# Altium PCB MiniSys.PcbDoc
Units mil, origin at the board's own origin, x right, y up, seen from the top; angles counter-clockwise.
Board outline 2000 x 2000 mil, 2 copper layers (Top Layer, Bottom Layer); 39 components, 56 nets, 168 pads, 40 vias.
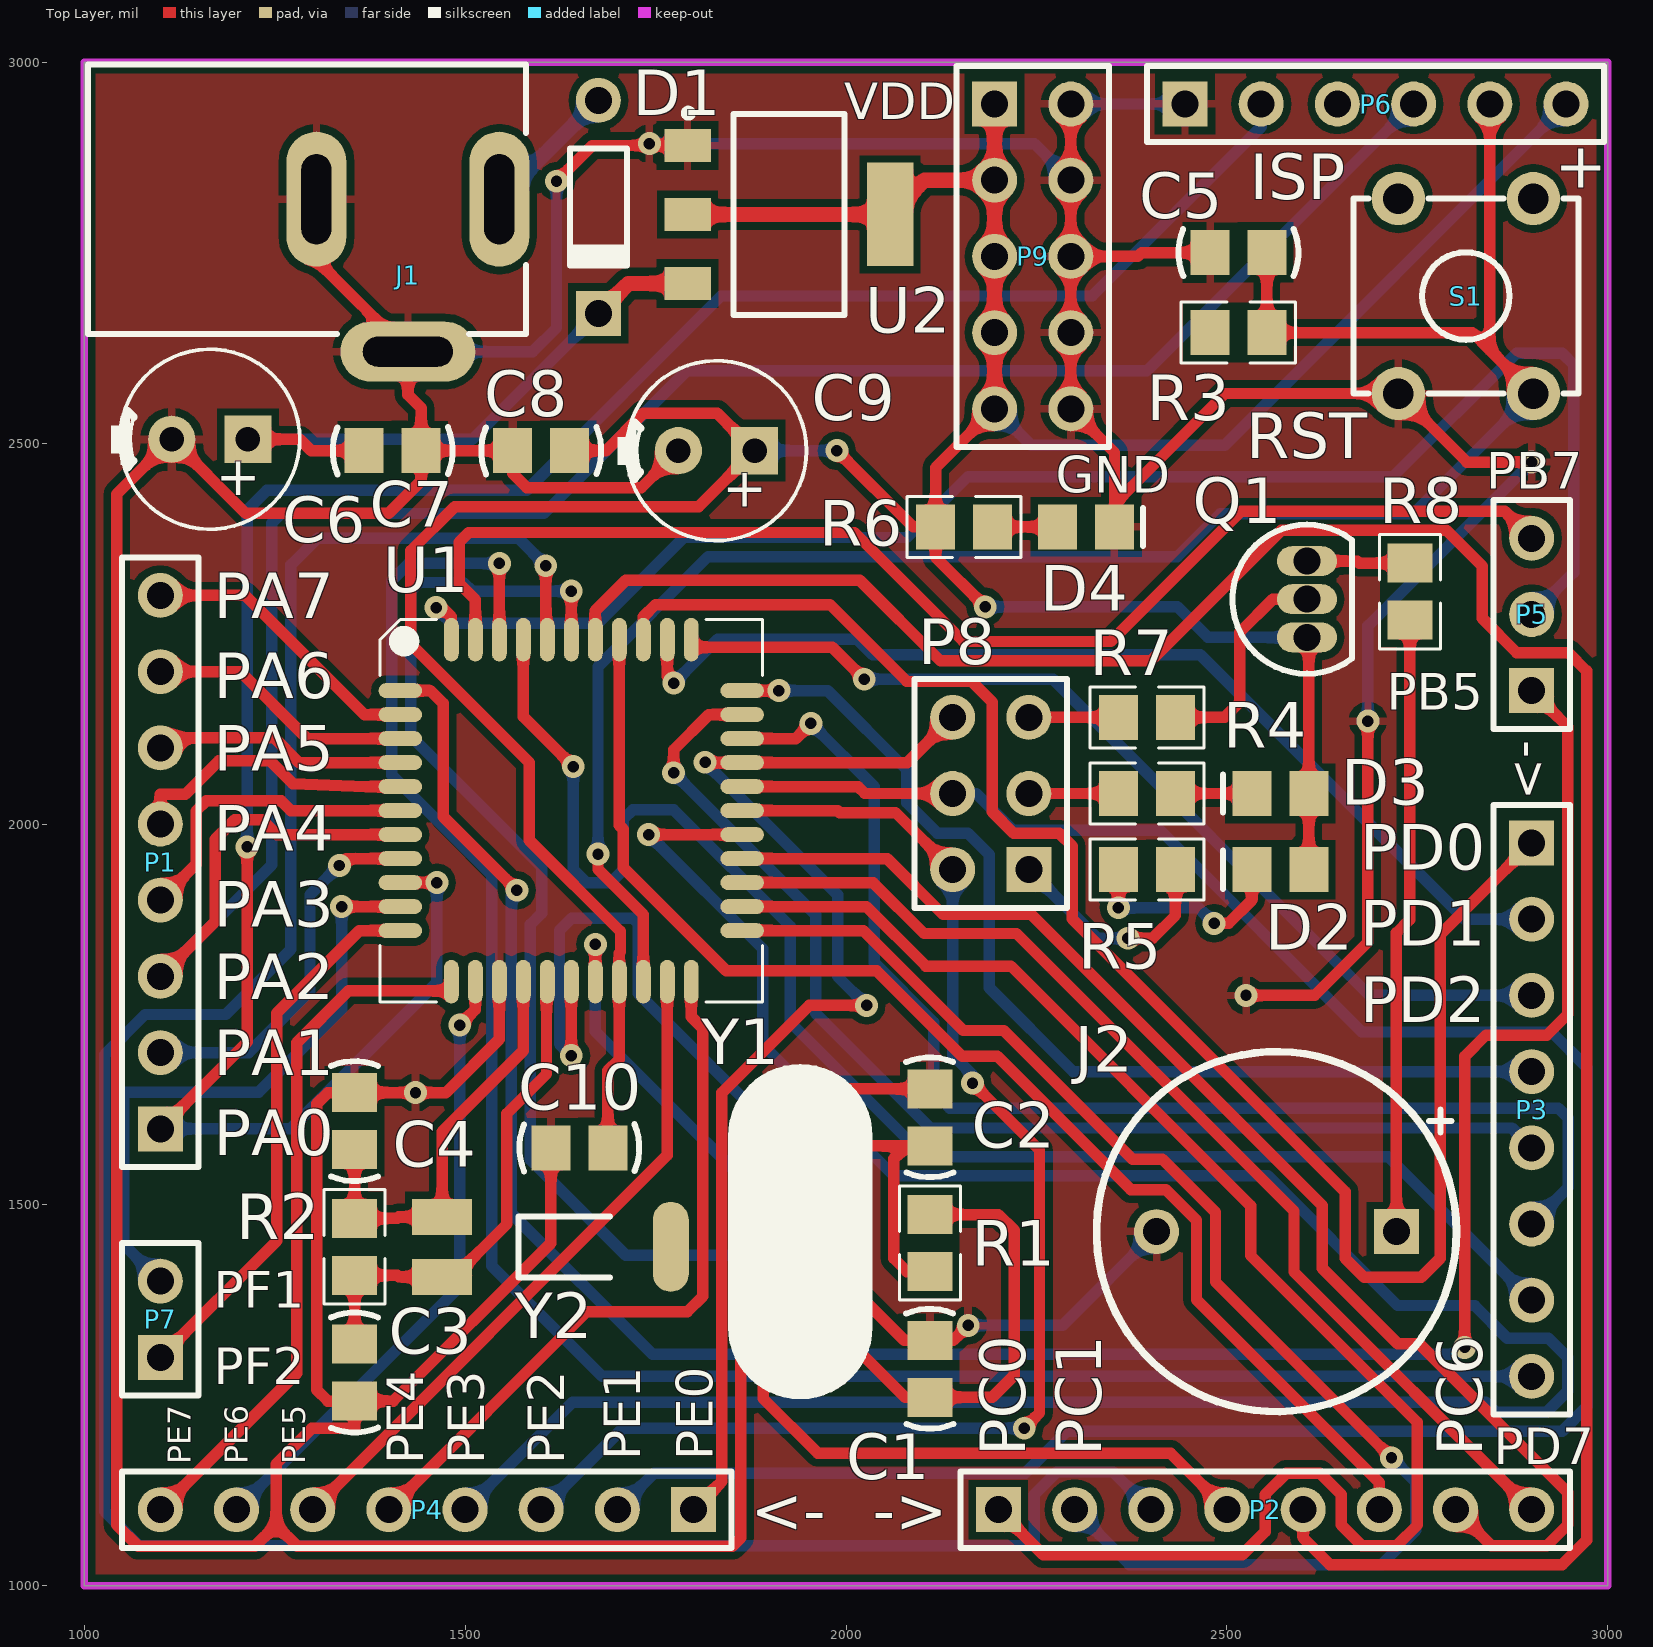
[diagram p0: Top Layer view]
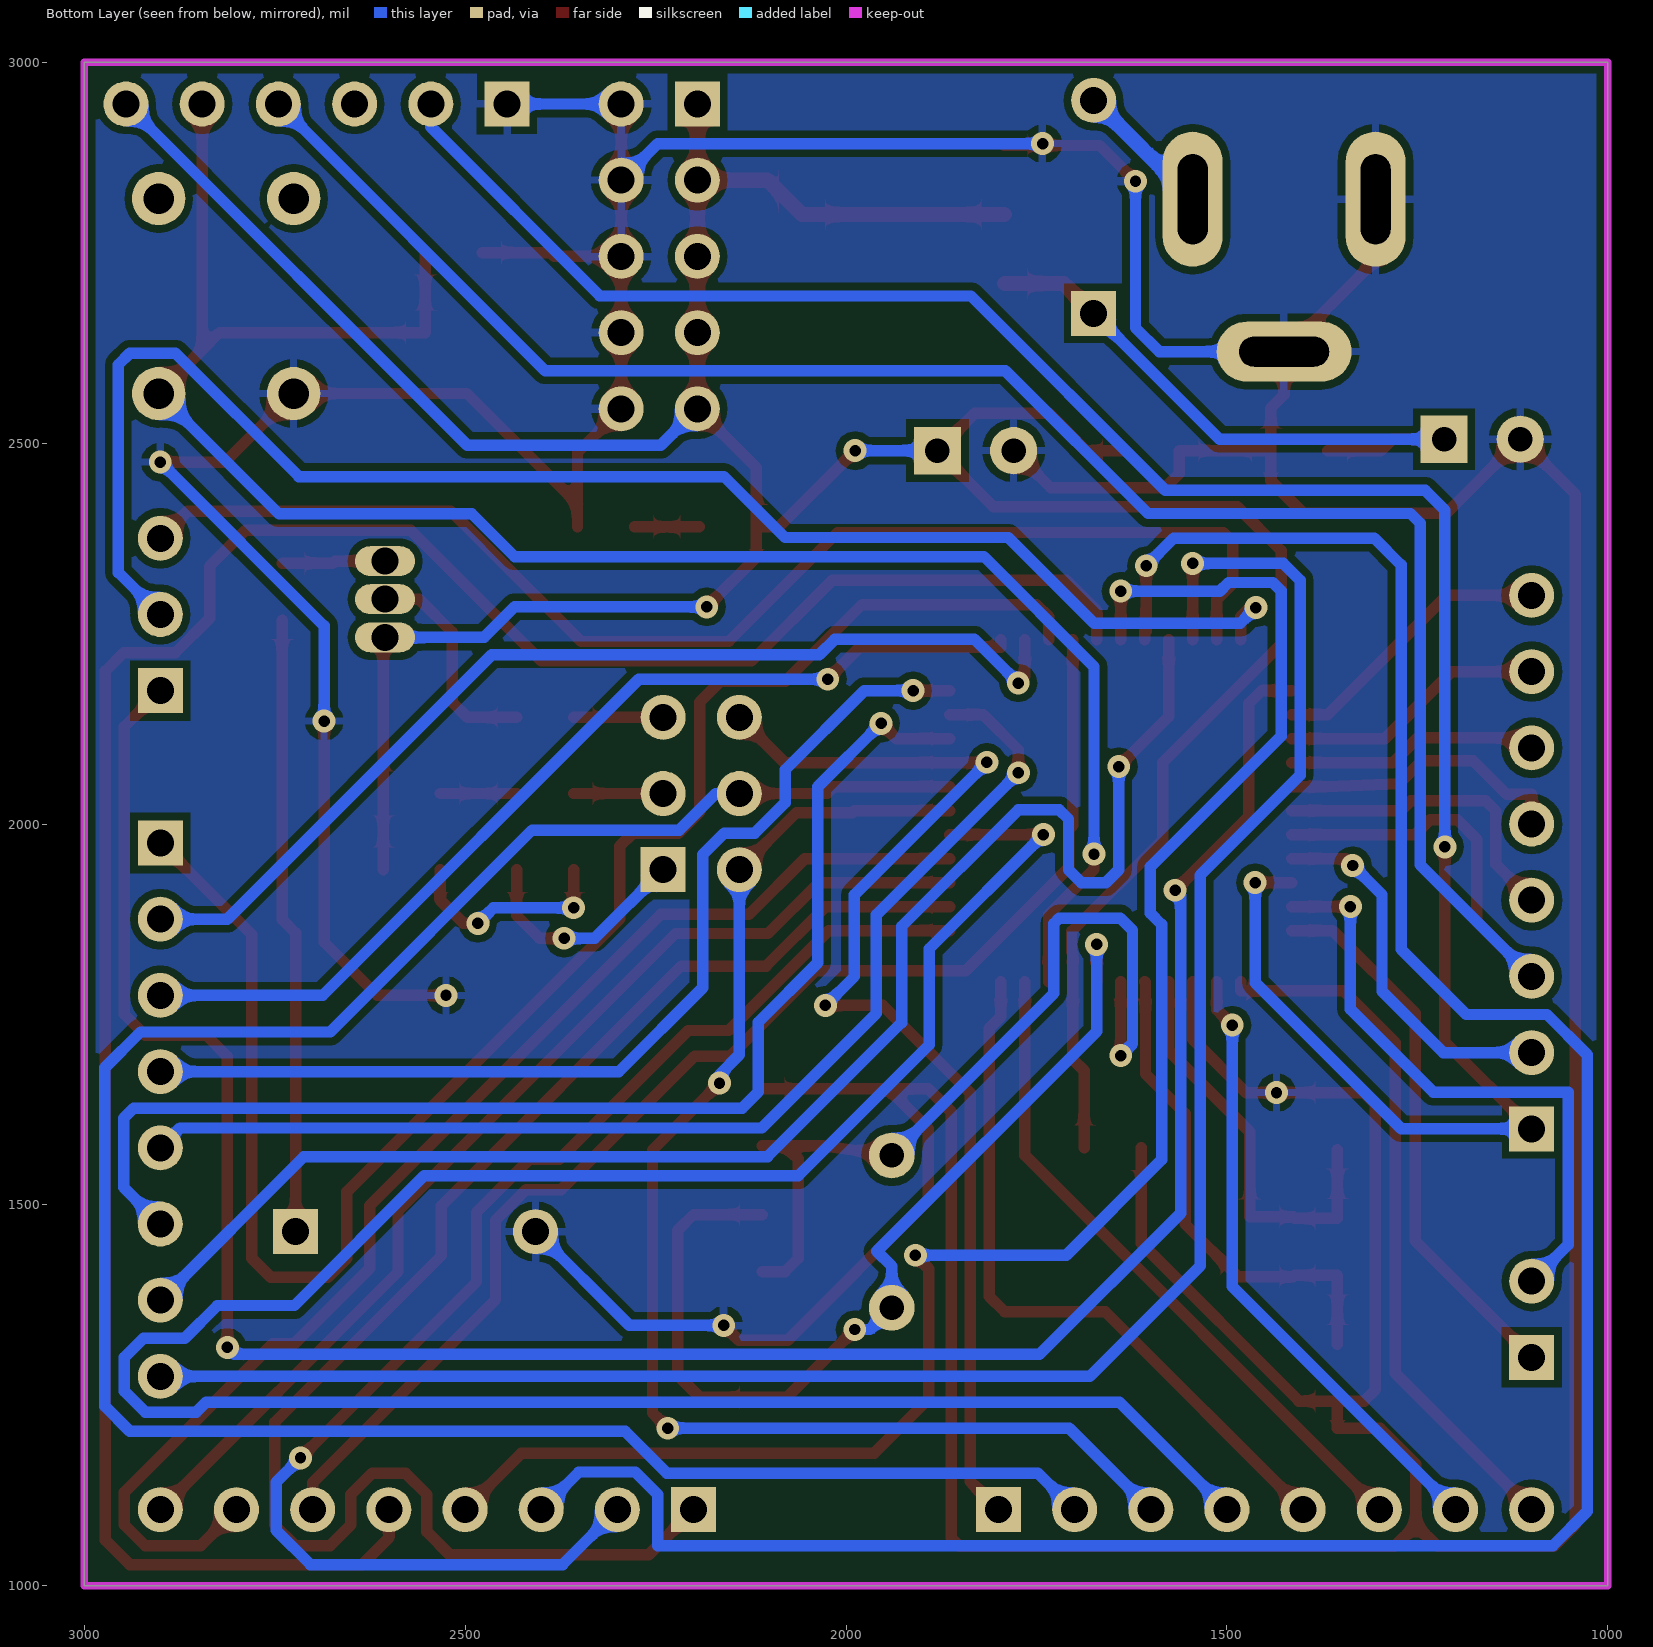
[diagram p1: Bottom Layer view, seen from below]

## Layer stack, top to bottom
Top Solder: solder mask 0.4, Solder Resist, Dk 3.5
Top Layer: signal copper 1.4
Dielectric 1: dielectric 12.6, FR-4, Dk 4.8
Bottom Layer: signal copper 1.4
Bottom Solder: solder mask 0.4, Solder Resist, Dk 3.5

## Board outline
1000,1000 1000,3000 3000,3000 3000,1000

## Design rules (kind name [scope] priority, off if disabled: settings)
Clearance [All] p1: gap=10
HoleSize [All] p1: absolutevalues=TRUE maxlimit=200 minlimit=1 maxpercent=80.000 minpercent=20.000
MinimumSolderMaskSliver [All] p1: minsoldermaskwidth=2
PolygonConnect [All] p1: connectstyle=Relief reliefconductorwidth=10 reliefentries=4 polygonreliefangle="90 Angle" airgapwidth=10
RoutingVias [All] p1: holewidth=15 width=30 viastyle="Through Hole" minholewidth=10 minwidth=20 maxholewidth=20 maxwidth=40
SilkToSilkClearance [All] p1: silktosilkclearance=0
SilkToSolderMaskClearance [IsPad] p1: minsilkscreentomaskgap=0 clearancetoexposedcopper=TRUE
SolderMaskExpansion [All] p1: expansion=4
Width [All] p1: maxlimit=20 minlimit=10 preferedwidth=15 minimp=50.000000 maximp=50.000000 favimp=50.000000
26 further rules are at their usual default settings.

## Components (designator, comment, footprint, x,y, rotation, side; value= is the part's Value field where it differs from the comment)
C1 "Cap" C-RAD-0805 2110,1285 r90 top
C2 "Cap" C-RAD-0805 2110,1615 r90 top
C3 "Cap" C-RAD-0805 1355,1280 r270 top
C4 "Cap" C-RAD-0805 1355,1610 r90 top
C5 "Cap" C-RAD-0805 2515,2750 r0 top
C6 "Cap Pol" RB.1/.2 1215,2505 r180 top
C7 "Cap" C-RAD-0805 1405,2490 r180 top
C8 "Cap" C-RAD-0805 1600,2490 r0 top
C9 "Cap Pol" RB.1/.2 1880,2490 r180 top
C10 "Cap" C-RAD-0805 1650,1575 r0 top
D1 "Diode" DIODE-AXL 1675,2810 r270 top
D2 "LED0" LED_0805 2570,1940 r180 top
D3 "LED0" LED_0805 2570,2040 r180 top
D4 "LED0" LED_0805 2315,2390 r0 top
J1 "PWRCON" DC-005 1580,2820 r180 top
J2 "BEEP" Beep 2565,1465 r180 top
P1 "PA" HDR1X8 1100,1600 r90 top
P2 "PC" HDR1X8 2200,1100 r0 top
P3 "PD" HDR1X8 2900,1975 r270 top
P4 "PE" HDR1X8 1800,1100 r180 top
P5 "PB" HDR3X1_A 2900,2175 r90 top
P6 "ISP" HDR1X6 2445,2945 r0 top
P7 "PF" HDR2X1_A 1100,1300 r90 top
P8 "Jump" HDR2X3 2240,1940 r90 top
P9 "VDD&VSS" HDR5X2_A1 2195,2945 r270 top
Q1 "S8550" TO-92A 2605,2295 r0 top
R1 "Res1" 0805-1 2110,1450 r270 top
R2 "Res1" 0805-1 1355,1445 r90 top
R3 "Res1" 0805-1 2515,2645 r0 top
R4 "Res1" 0805-1 2395,1940 r0 top
R5 "Res1" 0805-1 2395,2040 r180 top
R6 "Res1" 0805-1 2155,2390 r0 top
R7 "Res1" 0805-1 2395,2140 r0 top
R8 "Res1" 0805-1 2740,2305 r90 top
S1 "RST" BUTTON 2725,2565 r0 top
U1 "HT66FU50" LQFP44 1415,2175 r0 top
U2 "ASM1117" SOT-223 1925,2800 r270 top
Y1 "XTAL" X-HC49U 1940,1465 r90 top
Y2 "XTAL" X-TC15 1470,1445 r90 top

## Footprints (in the part's own frame and the unit in brackets; to place one, negate y for a bottom-side part, rotate by r counter-clockwise, add the part's x,y. Pads: shape width x height; smd on the part's side, far side on the other; paste and mask are expansions set on the pad)
0805-1 [mm] "贴片带丝印"
  rect 1.3x1.5 smd: 1(-0.95,0) 2(0.95,0)
  silkscreen extent -1.91,-1.02 1.91,1.02, body extent -1.14,-0.51 1.14,0.51, height 1
Beep [mm] "蜂鸣器"
  rect 1.5x1.5 hole 0.9: 1(-4,0)
  round 1.5 hole 0.9: 2(4,0)
  silkscreen extent -6,-6 6,6
BUTTON [mil]
  round 70 hole 40: 1(0,0) 2(177.17,0) 3(177.17,255.91) 4(0,255.91)
  silkscreen extent -59,0 236,256
C-RAD-0805 [mm] "贴片电容"
  rect 1.3x1.5 smd: 1(-0.95,0) 2(0.95,0)
  silkscreen extent -2,-0.79 2,0.79, body extent -1.27,-0.64 1.27,0.64, height 0.9
DC-005 [mm] "DC母座5.5mm"
  oval 2x4.5 hole 1 slot 3 at 90 deg: 1(0.889,0) 2(6.985,0)
  oval 4.5x2 hole 1 slot 3 at 0 deg: 3(3.937,5.08)
  silkscreen extent 0,-4.5 14.6,4.5, body extent 0,-4.44 14.6,4.45, height 11
DIODE-AXL [mm] "直插二极管"
  round 1.5 hole 0.9: 1(-3.55,0)
  rect 1.5x1.5 hole 0.9: 2(3.55,0)
  silkscreen extent -1.95,-0.95 2.05,0.95
HDR1X6 [mm] "Connector; Header; 6 Position"
  rect 1.5x1.5 hole 0.9: 1(0,0)
  round 1.5 hole 0.9: 2(2.54,0) 3(5.08,0) 4(7.62,0) 5(10.16,0) 6(12.7,0)
  silkscreen extent -1.27,-1.27 13.97,1.27
HDR1X8 [mm] "Connector; Header; 8 Position"
  rect 1.5x1.5 hole 0.9: 1(0,0)
  round 1.5 hole 0.9: 2(2.54,0) 3(5.08,0) 4(7.62,0) 5(10.16,0) 6(12.7,0) 7(15.24,0) 8(17.78,0)
  silkscreen extent -1.27,-1.27 19.05,1.27
HDR2X1_A [mm] "Connector; Header; 2 Position"
  rect 1.5x1.5 hole 0.9: 1(0,0)
  round 1.5 hole 0.9: 2(2.54,0)
  silkscreen extent -1.27,-1.27 3.81,1.27
HDR2X3 [mm] "Connector; Header; 3x2 Position"
  rect 1.5x1.5 hole 0.9: 1(0,0)
  round 1.5 hole 0.9: 2(0,2.54) 3(2.54,0) 4(2.54,2.54) 5(5.08,0) 6(5.08,2.54)
  silkscreen extent -1.27,-1.27 6.35,3.81
HDR3X1_A [mm] "Connector; Header; 3 Position"
  rect 1.5x1.5 hole 0.9: 1(0,0)
  round 1.5 hole 0.9: 2(2.54,0) 3(5.08,0)
  silkscreen extent -1.27,-1.27 6.35,1.27
HDR5X2_A1 [mm] "Connector; Header; 5x2 Position"
  rect 1.5x1.5 hole 0.9: 1(0,0)
  round 1.5 hole 0.9: 2(0,2.54) 3(2.54,0) 4(2.54,2.54) 5(5.08,0) 6(5.08,2.54) 7(7.62,0) 8(7.62,2.54) 9(10.16,0) 10(10.16,2.54)
  silkscreen extent -1.27,-1.27 11.43,3.81
LED_0805 [mm] "贴片二极管"
  rect 1.3x1.5 smd: 1(-0.95,0) 2(0.95,0)
  silkscreen extent 1.91,-0.63 1.91,0.64
LQFP44 [mm]
  oval 1.45x0.5 smd: 1(0,0) 2(0,-0.8) 3(0,-1.6) 4(0,-2.4) 5(0,-3.2) 6(0,-4) 7(0,-4.8) 8(0,-5.6) 9(0,-6.4) 10(0,-7.2) 11(0,-8) 23(11.4,-8) 24(11.4,-7.2) 25(11.4,-6.4) 26(11.4,-5.6) 27(11.4,-4.8) 28(11.4,-4) 29(11.4,-3.2) 30(11.4,-2.4) 31(11.4,-1.6) 32(11.4,-0.8) 33(11.4,0)
  oval 0.5x1.45 smd: 12(1.7,-9.7) 13(2.5,-9.7) 14(3.3,-9.7) 15(4.1,-9.7) 16(4.9,-9.7) 17(5.7,-9.7) 18(6.5,-9.7) 19(7.3,-9.7) 20(8.1,-9.7) 21(8.9,-9.7) 22(9.7,-9.7) 34(9.7,1.7) 35(8.9,1.7) 36(8.1,1.7) 37(7.3,1.7) 38(6.5,1.7) 39(5.7,1.7) 40(4.9,1.7) 41(4.1,1.7) 42(3.3,1.7) 43(2.5,1.7) 44(1.7,1.7)
  silkscreen extent -0.67,-10.37 12.08,2.38
RB.1/.2 [mil]
  rect 62x62 hole 32: 1(0,0)
  round 62 hole 32: 2(100,0)
  silkscreen extent -68,-118 180,118
SOT-223 [mm]
  rect 1.1x1.55 smd: 1(-2.3,-3.375) 2(0,-3.375) 3(2.3,-3.375)
  rect 3.45x1.55 smd: 4(0,3.375)
  silkscreen extent -3.5,-3.48 3.35,1.85, body extent -3.3,-3.94 3.3,3.43, height 0.8
TO-92A [mm]
  oval 2x1 hole 0.9: 1(0,-1.27) 2(0,0) 3(0,1.27)
  silkscreen extent -2.48,-2.48 1.5,2.48
X-HC49U [mil] "插件晶振"
  round 60 hole 32: 1(-100,0) 2(100,0)
  silkscreen extent -215,-90 215,90
X-TC15 [mm] "圆柱晶振1"
  rect 1.2x2 smd: 1(-1,0) 2(1,0)
  oval 3x1.2 smd: 3(0,-7.62)
  silkscreen extent -1.02,-5.59 1.02,-2.54, body extent -1,-8.29 1,0, height 1.99

## Part data
C1 C2 C3 C4 C5 C7 C8 C10: "无极性电容"
C6 C9: "极性电解电容"
D1: "二极管"
D2 D3 D4: "发光二极管"
J1: "直流电源端子"
J2: "蜂鸣器"
P1 P2 P3 P4: library part "Header 8", "Header, 8-Pin"
P5: library part "Header 3", "接插件"
P6: library part "Header 6", "接插件"
P7: library part "Header 2", "接插件"
P8: library part "Header 3X2", "Header, 3-Pin, Dual row"
P9: library part "Header 5X2", "接插件"
Q1: "PNP三极管"
R1 R2 R3 R4 R5 R6 R7 R8: "贴片电阻"
S1: library part SW-PB, "微动开关"
U1: library part HT66FXXX, "HT66FXXX LQPF44"
U2: "3.3V稳压芯片"
Y1 Y2: "晶振"

## Via types
v1: diameter 30, hole 15, Top Layer to Bottom Layer, 40 vias

## Nets (pads, with @x,y where several pads share a name; then routed paths per layer and width w, separated by ;. In a path a pad name is that pad's centre, name@x,y a point inside that pad or via, vN(x,y) a via of type N, cw(c..) or ccw(c..) an arc to the next point about the centre after c; other vN are vias at no path point)
GND: C1.2 C2.2 C3.2 C4.2 C5.1 C6.2 C7.1 C8.1 C9.2 C10.1 D4.2 J1.2 J1.3 J2.2 P6.1 P9.2 P9.4 P9.6 P9.8 P9.10 S1.1 U1.14 U2.1 | length 10281.2
  Top Layer w15: J1.2 1305,2740 J1.3 1425,2563.4 1442.4,2546 C7.1 ; U1.14 1544.92,1717.42 1474.9,1647.4 C4.2 1320,1647.4 1305.47,1632.87 1305.47,1257.13 1320,1242.6 C3.2 ; C10.1 1612.6,1449.6 1405.6,1242.6 C3.2 ; v1(1620,2843.55) 1667,2890.55 v1@1744.45,2890.55 ; v1(1742,2893) v1@1744.45,2890.55 ; C9.2 1731.5,2441.5 1581.1,2441.5 1562.6,2460 C8.1 C7.1 ; U2.1 v1@1744.45,2890.55 ; C2.2 1944.4,1652.4 ; v1(2160.4,1342) 2140.8,1322.4 C1.2 2076.6,1322.4 1892,1507 1892,1600 1944.4,1652.4 ; P9.2 P9.4 P9.6 ; D4.2 2352.4,2420 ; C5.1 2388,2750 2383,2745 P9.6 ; v1(2525,1775) 2615,1775 2685,1845 v1(2685,2135) ; v1(2900,2475) 2815,2475 S1.1 2497.4,2565 2352.4,2420 ; 1252,1080 1224,1052 1071,1052 1043,1080 1043,2433 C6.2 1212,2408 1400,2408 1442.4,2450.4 C7.1 ; 1252,1080 1280,1052 1851,1052 1862,1063 1862,1622.4 1892,1652.4 1944.4,1652.4 ; 1252,1080 1252,1160 1299,1207 1355,1207 C3.2 ; P9.6 P9.8 P9.10 2352.4,2487.6 2352.4,2420
  Bottom Layer w15: J1.3 1589,2620 1620,2651 v1(1620,2843.55) ; v1(1742,2893) 2247,2893 P9.4 ; v1(2160.4,1342) 2284.52,1342 J2.2 ; P9.2 P6.1 ; v1(2685,2135) 2685,2260 v1(2900,2475)
  other v1: 1435,1647.4
NetC6_1: C6.1 C7.2 D1.2 U2.3 | length 820.6
  Top Layer w15: C6.1 1283,2505 1298,2490 C7.2
  Top Layer w20: D1.2 1714.21,2709.45 U2.3
  Bottom Layer w15: C6.1 1509.76,2505 D1.2
NetD1_1: D1.1 J1.1 | length 183.8
  Bottom Layer w15: D1.1@1674.76,2949.76 D1.1
  Bottom Layer w20: J1.1 D1.1@1674.76,2949.76
NetD2_2: D2.2 R4.1 | length 286
  Top Layer w15: v1(2357.6,1890) R4.1 ; v1(2483.18,1869.6) 2502.2,1869.6 2532.6,1900 D2.2
  Bottom Layer w15: v1(2357.6,1890) 2462.78,1890 v1(2483.18,1869.6)
NetD3_2: D3.2 R5.1 | length 100.2
  Top Layer w15: R5.1 D3.2
NetD4_1: D4.1 R6.2 | length 85.2
  Top Layer w15: R6.2 D4.1
NetJ2_1: J2.1 R8.1 | length 809.9
  Top Layer w15: J2.1 2722.48,1857 2740,1874.52 R8.1
NetP8_1: P8.1 R4.2 | length 302.1
  Top Layer w15: v1(2370,1850) 2402.4,1850 2432.4,1880 R4.2
  Bottom Layer w15: P8.1 2330,1850 v1(2370,1850)
NetP8_3: P8.3 R5.2 | length 117.6
  Top Layer w15: P8.3 R5.2
NetP8_5: P8.5 R7.1 | length 117.6
  Top Layer w15: P8.5 R7.1
NetQ1_2: Q1.2 R7.2 | length 290.7
  Top Layer w15: R7.2 2497,2140 2517,2160 2517,2252 2560,2295 Q1.2
NetQ1_3: Q1.3 R8.2 | length 136.1
  Top Layer w15: Q1.3 2671,2345 2673.6,2342.4 R8.2
OSC1: C1.1 R1.1 U1.18 Y1.1 | length 1304.3
  Top Layer w15: U1.18 1670.91,1841.91 v1(1671,1842) ; v1(1988.5,1336.5) 2077.4,1247.6 C1.1 2191.91,1247.6 2220.68,1276.37 2220.68,1466.72 2200,1487.4 R1.1
  Bottom Layer w15: v1(1671,1842) 1671,1727.76 1959.5,1439.26 1940,1419.76 Y1.1 1968.5,1336.5 v1(1988.5,1336.5)
OSC2: C2.1 R1.2 U1.17 Y1.2 | length 1153.5
  Top Layer w15: v1(1639.41,1696) U1.17 ; Y1.2 2030.6,1577.6 2080,1577.6 ; R1.2 2080,1412.6 2062.85,1429.74 2062.85,1560.45 2080,1577.6 ; C2.1 2080,1577.6
  Bottom Layer w15: v1(1639.41,1696) 1624,1711.41 1624,1860.58 1640,1876.58 1720,1876.58 1727.16,1869.42 1727.16,1777.84 Y1.2
PA0: P1.1 P6.2 U1.9 | length 3050.3
  Top Layer w15: P1.1 1214,1714 v1(1214,1970) ; U1.9 v1(1463,1923.03)
  Bottom Layer w15: P1.1 1271.23,1600 1463,1791.77 v1(1463,1923.03) ; v1(1214,1970) 1214,2412 1240,2438 1581,2438 1836,2693 2323,2693 2545,2915 P6.2
PA1: P1.2 U1.8 | length 494.5
  Top Layer w15: v1(1335,1945.51) 1344.02,1954.53 U1.8
  Bottom Layer w15: P1.2 1216,1700 1296.5,1780.5 1296.5,1907.01 v1(1335,1945.51)
PA2: P1.3 P6.4 U1.7 | length 2853.4
  Top Layer w15: P1.3 1172.03,1872.03 1172.03,1980 1197.54,2005.51 1233.51,2005.51 1253,1986.02 U1.7
  Bottom Layer w15: P1.3 1246.5,1946.5 1246.5,2395 1259.08,2407.58 1603.58,2407.58 1791,2595 2395,2595 P6.4
PA3: P1.4 U1.6 | length 415.5
  Top Layer w15: P1.4 1147.03,1947.03 1147.03,2017.06 1160.48,2030.51 1258.51,2030.51 1271.5,2017.52 U1.6
PA4: P1.5 U1.5 | length 384.7
  Top Layer w15: P1.5 1100,2039 1133,2039 1177,2083 1244,2083 1274,2053 1369.98,2049.02 U1.5
PA5: P1.6 U1.4 | length 333.9
  Top Layer w15: P1.6 1113.12,2113.12 1249.56,2113.12 1282.17,2080.51 U1.4
PA6: P1.7 U1.3 | length 351.4
  Top Layer w15: P1.7 1205,2200 1292.99,2112.01 U1.3
PA7: P1.8 U1.2 | length 379.8
  Top Layer w15: P1.8 1211.5,2300 1368,2143.5 U1.2
PB5: P5.1 U1.1 | length 3091.3
  Top Layer w15: U1.1 1454.64,2175 1471.35,2158.29 1471.35,2009.65 v1(1568,1913) ; v1(2812,1313) 2812,1695 2840,1723 2920,1723 2947.03,1750.03 2947.03,2127.97 P5.1
  Bottom Layer w15: v1(1568,1913) 1560.77,1905.77 1560.77,1489.23 1746,1304 2803,1304 v1(2812,1313)
PB6: P5.2 U1.44 | length 2060.5
  Top Layer w15: v1(1462,2284) 1470,2284 1481.93,2272.07 U1.44
  Bottom Layer w15: v1(1462,2284) 1482.71,2263.29 1674.29,2263.29 1787,2376 2080.1,2376 2160.1,2456 2718,2456 2880,2618 2940,2618 2955,2603 2955,2330 P5.2
PB7: P5.3 U1.43 | length 1694.3
  Top Layer w15: U1.43 1513.43,2294.57 1492.42,2315.57 1492.42,2370 1505,2382.58 2011.07,2382.58 2154.12,2239.53 2347.53,2239.53 2518.49,2410.49 2864.51,2410.49 P5.3
PC0: P2.1 U1.24 | length 2060.9
  Top Layer w15: U1.24 2026.85,1891.54 2104.87,1813.51 2216.49,1813.51 2531,1499 2531,1433.64 2750,1214.64 2750,1080 2722.97,1052.97 2677.03,1052.97 2650,1080 2650,1120 2622,1148 2578,1148 2550,1120 2550,1071 2520,1041 2259,1041 P2.1
PC1: P2.2 U1.23 | length 1797.1
  Top Layer w15: U1.23 2022.99,1860.04 2154.03,1729 2207,1729 2376,1560 2415.36,1560 2485,1490.36 2485,1399 v1(2716,1168)
  Bottom Layer w15: P2.2 2372.03,1027.97 2702.97,1027.97 2748,1073 2748,1136 v1(2716,1168)
PC2: P2.3 U1.40 | length 3359.7
  Top Layer w15: v1(1606,2339) 1606,2253 1607.91,2253 U1.40
  Bottom Layer w15: v1(1606,2339) 1570,2375 1306.5,2375 1271.5,2340 1271.5,1835.5 1186,1750 1080,1750 1027,1697 1027,1098 1072.03,1052.97 2247.03,1052.97 2247.03,1120 2276.53,1149.5 2350.5,1149.5 P2.3
PC3: P2.4 U1.39 | length 2347.1
  Top Layer w15: U1.39 v1(1639.41,2305.59) ; v1(1909,1434) 1891.16,1416.16 1891.16,1246 1963.16,1174 2426,1174 P2.4
  Bottom Layer w15: v1(1639.41,2305.59) 1509.41,2305.59 1498,2317 1440,2317 1429,2306 1429,2115.24 1600.5,1943.74 1600.5,1883 1585.77,1868.27 1585.77,1559.23 1711,1434 v1(1909,1434)
PC4: P2.5 U1.38 | length 3165
  Top Layer w15: U1.38 1670.91,2280 1710.91,2320 2018.03,2320 2124.03,2214 2400,2214 2571.49,2385.49 2788,2385.49 2835,2338.49 2835,2270 2880,2225 2948,2225 2972.03,2200.97 2972.03,1060 2940,1027.97 2635.03,1027.97 2600,1063.01 P2.5
PC5: P2.6 U1.37 | length 1724.8
  Top Layer w15: U1.37 1702.4,1998.43 1707.67,1993.16 1707.67,1942.68 1842.82,1807.54 2040.12,1807.54 2152.36,1695.29 2198.71,1695.29 2374,1520 2420,1520 2460,1480 2460,1375.72 2700,1135.72 P2.6
PC6: P2.7 U1.26 | length 1696.5
  Top Layer w15: U1.26 2054.09,1954.53 2127.34,1881.28 2243.03,1881.28 2625,1499.31 2625,1417 2724.28,1317.72 2752.28,1317.72 2947.03,1122.97 2947.03,1080 2920,1052.97 2847.03,1052.97 P2.7
PC7: P2.8 U1.25 | length 1424
  Top Layer w15: U1.25 2035.58,1923.03 2102.34,1856.28 2223.72,1856.28 2588,1492 2588,1412 P2.8
PD0: P3.1 U1.36 | length 2245.1
  Top Layer w15: U1.36 1733.9,2271.9 1750,2288 1979.03,2288 2080,2187.03 2164.97,2187.03 2192,2160 2192,2016 2220,1988 2280,1988 2297,1971 2297,1875.43 2655,1517.43 2655,1430 2680,1405 2755,1405 2780,1430 2780,1855 P3.1
PD1: P3.2 U1.35 | length 1362.5
  Top Layer w15: U1.35 1765.39,2193.61 v1(1774,2185)
  Bottom Layer w15: v1(1774,2185) 1831.5,2242.5 2014.5,2242.5 2034.97,2222.03 2465,2222.03 2812.03,1875 P3.2
PD2: P3.3 U1.34 | length 1302.3
  Top Layer w15: U1.34 1796.89,2232 1982,2232 v1(2024,2190)
  Bottom Layer w15: v1(2024,2190) 2272,2190 2687,1775 P3.3
PD3: P3.4 U1.33 | length 1371
  Top Layer w15: U1.33 v1(1912,2175)
  Bottom Layer w15: v1(1912,2175) 1976.01,2175 2080,2071.01 2080,2028 2120,1988 2160,1988 2188,1960 2188,1785 2298,1675 P3.4
PD4: P3.5 U1.32 | length 1545.1
  Top Layer w15: v1(1773.75,2067.23) 1773.75,2097.25 1820,2143.5 U1.32
  Bottom Layer w15: v1(1773.75,2067.23) 1960.28,1880.7 1960.28,1751.38 2110.66,1601 2874,1601 P3.5
PD5: P3.6 U1.31 | length 1654.9
  Top Layer w15: U1.31 1934,2112.01 v1(1954,2132.01)
  Bottom Layer w15: v1(1954,2132.01) 2037,2049.01 2037,1817.96 2115,1739.96 2115,1648.44 2136.44,1627 2935,1627 2948,1614 2948,1523 P3.6
PD6: P3.7 U1.41 | length 2013.1
  Top Layer w15: U1.41 1576.42,2141 v1(1642,2075.42)
  Bottom Layer w15: v1(1642,2075.42) 1642,1940 1659,1923 1691,1923 1708,1940 1708,2006.52 1720,2018.52 1774,2018.52 1927,1865.52 1927,1739.36 2102.86,1563.5 2711.5,1563.5 P3.7
PD7: P3.8 U1.42 | length 2629.5
  Top Layer w15: U1.42 1544.92,2341.92 v1(1545,2342)
  Bottom Layer w15: v1(1545,2342) 1426,2342 1404,2320 1404,2064 1535.07,1932.93 1535.07,1420.05 1680.11,1275 P3.8
PE0: P4.1 P8.6 U1.30 | length 1556.6
  Top Layer w15: P4.1 1837,1137 1837,1647 1952,1762 v1(2027,1762) ; v1(1815,2081) 1815.49,2080.51 U1.30 2080.51,2080.51 P8.6
  Bottom Layer w15: v1(1815,2081) 1989,1907 1989,1800 v1(2027,1762)
PE1: P4.2 P8.4 U1.29 | length 3035.4
  Top Layer w15: U1.29 2015.85,2049.02 2024.87,2040 P8.4
  Bottom Layer w15: P4.2 1748,1148 2235,1148 2289.97,1202.97 2940,1202.97 2973,1235.97 2973,1680 2926,1727 2677,1727 2412,1992 2219,1992 2171,2040 P8.4
PE2: P4.3 P8.2 U1.28 | length 1775.1
  Top Layer w15: U1.28 1988.93,2017.52 1991.45,2015 2065,2015 P8.2 ; v1(2166,1660) 2254,1572 2254,1227 v1(2234,1207)
  Bottom Layer w15: P4.3 1707,1207 v1(2234,1207) ; P8.2 2140,1697 2166,1671 v1(2166,1660)
PE3: P4.4 U1.27 | length 3253.6
  Top Layer w15: v1(1741,1986.02) U1.27
  Bottom Layer w15: P4.4 1641,1241 2839.97,1241 2853,1227.97 2919.48,1227.97 2947.03,1255.52 2947.03,1300 2922.03,1325 2868,1325 2825,1368 2724,1368 2553.5,1538.5 2062.5,1538.5 1891,1710 1891,1836.02 v1(1741,1986.02)
PE4: P4.5 U1.22 | length 947.3
  Top Layer w15: P4.5 1660,1360 1792,1360 1812,1380 1812,1731.89 1796.89,1747 U1.22
PE5: P4.6 U1.21 | length 885.9
  Top Layer w15: P4.6 1765.39,1565.39 U1.21
PE6: P4.7 U1.13 | length 822.9
  Top Layer w15: v1(1493,1736) 1513.43,1756.43 U1.13
  Bottom Layer w15: P4.7 1493,1393 v1(1493,1736)
PE7: P4.8 U1.12 | length 930.4
  Top Layer w15: P4.8 1279,1279 1279,1713 1347,1781 1481.93,1781 U1.12
PF0: P7.1 U1.11 | length 722.1
  Top Layer w15: P7.1 1252.75,1452.75 1252.75,1751.79 1361,1860.04 U1.11
PF1: P7.2 U1.10 | length 810.6
  Top Layer w15: v1(1338,1891.54) U1.10
  Bottom Layer w15: P7.2 1052,1448 1052,1648 1229,1648 1338,1757 v1(1338,1891.54)
RESET: C5.2 P6.5 R3.2 S1.2 U1.20 | length 2624.9
  Top Layer w15: v1(1674.52,1960.48) 1674.52,1940.48 1733.9,1881.1 U1.20 ; C5.2 R3.2 2822.17,2645 2845,2622.17 ; P6.5 2845,2622.17 ; S1.2 2845,2622.17
  Bottom Layer w15: v1(1674.52,1960.48) 1674.52,2206.52 1819,2351 2435,2351 2491,2407 2744.17,2407 S1.2
VDD: C8.2 C9.1 C10.2 D2.1 D3.1 P6.6 P9.1 P9.3 P9.5 P9.7 P9.9 Q1.1 R6.1 U1.19 U2.2 U2.4 | length 4814.5
  Top Layer w15: C8.2 1685,2490 1734,2539 1831,2539 C9.1 1806.5,2416.5 1486.5,2416.5 1429,2359 1429,2236 1584.3,2080.7 1584.3,1978.76 1704,1859.06 1704,1832 1702.4,1830.4 U1.19 1702.4,1691 1687.4,1676 C10.2 ; v1(1988,2490) 2088,2390 R6.1 ; v1(2182.78,2285) 2117.6,2350.18 R6.1 ; P9.9 2117.6,2467.6 R6.1 ; Q1.1 2607.4,2245 D3.1 D2.1
  Top Layer w20: U2.2 U2.4 2102.87,2845 P9.3 ; P9.9 P9.7 P9.5 P9.3 ; P9.1 P9.3
  Bottom Layer w15: C9.1 v1(1988,2490) ; v1(2182.78,2285) 2435,2285 2475,2245 Q1.1 ; P9.9 2243,2497 2497,2497 P6.6
VSS: R3.1
XT1: C3.1 R2.1 U1.16 Y2.1 | length 659.8
  Top Layer w15: C3.1 R2.1 1411,1407.6 1412.97,1405.63 Y2.1 1485.63,1405.63 1555,1475 1555,1620 1606.91,1671.91 1606.91,1792.11 U1.16
XT2: C4.1 R2.2 U1.15 Y2.2 | length 558.8
  Top Layer w15: C4.1 R2.2 1411,1482.4 1412.97,1484.37 Y2.2 1470,1596 1576.42,1702.42 U1.15
pads on no net: P6.3 S1.3 S1.4 Y2.3

## Polygon pours and split planes (outlines as drawn)
GND on Top Layer "GND_L01_P022" (solid, remove dead copper, pour order 22): 1000,3000 1000,1000 3000,1000 3000,3000 1000,3000
GND on Bottom Layer "GND_L02_P024" (solid, remove dead copper, pour order 24): 1000,3000 1000,1000 3000,1000 3000,3000 1000,3000

## Keep-outs
Keep-Out Layer:
  the board outline again, w10

## Silkscreen, mask and mechanical layers (free items; w line width, h text height)
Top Overlay:
  circle w20: c1420,2240 r10
  text "VDD" at 1997.83,2925 h48
  text "+" at 2930,2835 h60
  text "ISP" at 2530,2820 h60
  text "RST" at 2525,2480 h60
  text "PB7" at 2840,2440 h48
  text "GND" at 2275,2435 h48
  text "PA7" at 1170,2270 h60
  text "PA6" at 1170,2165 h60
  text "PB5" at 2710,2150 h48
  text "->" at 2875,2110 h48 r270
  text "PA5" at 1170,2070 h60
  text "PA4" at 1170,1965 h60
  text "PD0" at 2675,1940 h60
  text "PA3" at 1170,1865 h60
  text "PD1" at 2675,1840 h60
  text "PA2" at 1170,1770 h60
  text "PD2" at 2675,1740 h60
  text "PA1" at 1170,1670 h60
  text "PA0" at 1170,1565 h60
  text "PF1" at 1170,1365 h48
  text "PF2" at 1170,1265 h48
  text "PC0" at 2235,1170 h60 r90
  text "PC1" at 2335,1170 h60 r90
  text "PC6" at 2835,1170 h60 r90
  text "PE1" at 1730,1165 h48 r90
  text "PE0" at 1825,1165 h48 r90
  text "PE7" at 1140,1160 h30 r90
  text "PE6" at 1215,1160 h30 r90
  text "PE5" at 1290,1160 h30 r90
  text "PE4" at 1445,1160 h48 r90
  text "PE3" at 1525,1160 h48 r90
  text "PE2" at 1630,1160 h48 r90
  text "PD7" at 2850,1160 h48
  text "<-" at 1875,1070 h60
  text "->" at 2035,1070 h60

## Text inside footprints (layer, text, board x,y; h text height)
C6: Top Overlay "+" at 1231.73,2475.47 h51.18 r180
C9: Top Overlay "+" at 1896.73,2460.47 h51.18 r180